# Altium PCB sensor_module.PcbDoc
Units mm, origin at the board's own origin, x right, y up, seen from the top; angles counter-clockwise.
Board outline 17 x 49 mm, 2 copper layers (Top Layer, Bottom Layer), stack 0.573 mm thick; 52 components, 25 nets, 140 pads, 57 vias.
Unrouted connection lines stored in the file: 2.
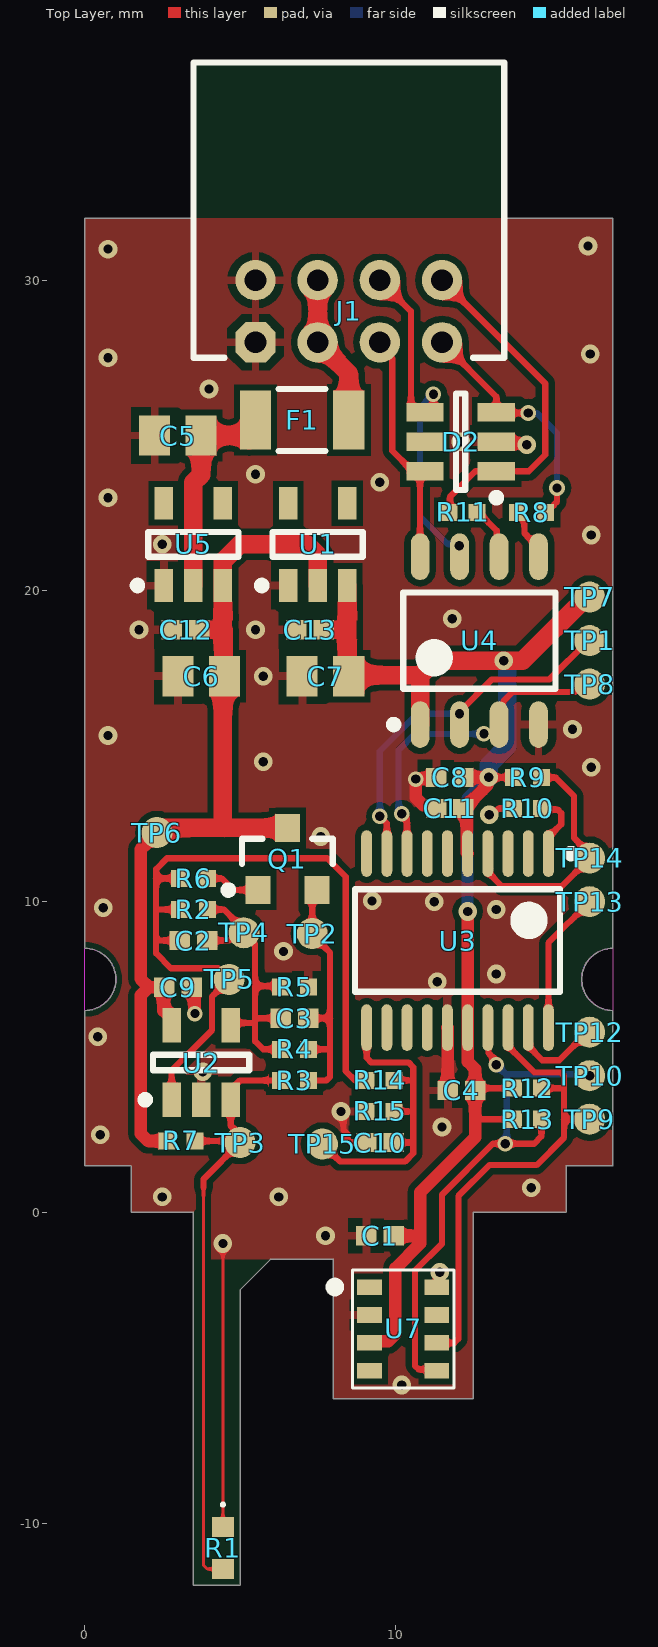
[diagram p0: Top Layer view]
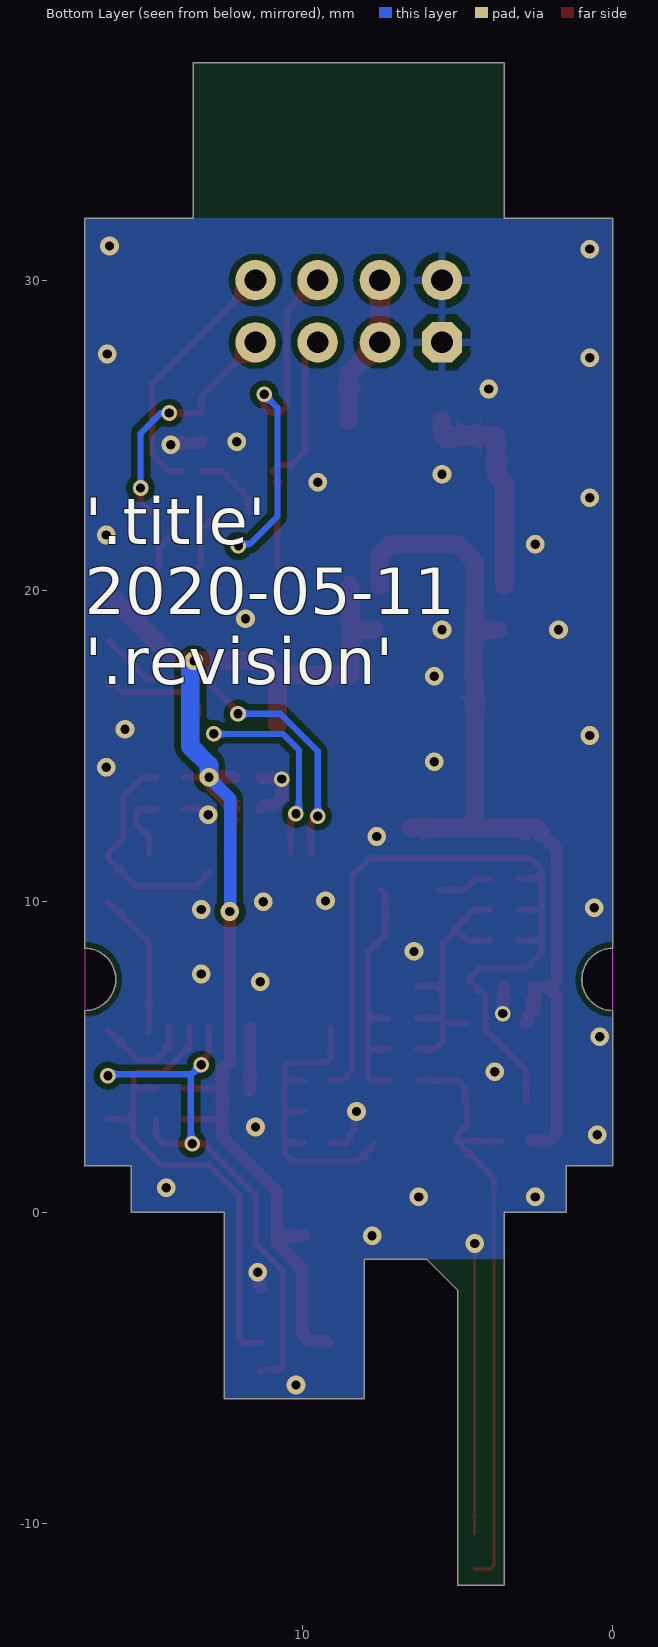
[diagram p1: Bottom Layer view, seen from below]

## Layer stack, top to bottom
Top Solder: solder mask 0.0127, Solder Resist, Dk 3.8
Top Layer: signal copper 0.0356
Dielectric 1: dielectric 0.502, FR-4, Dk 4.8
Bottom Layer: signal copper 0.0356
Bottom Solder: solder mask 0.0127, Solder Resist, Dk 3.8

## Board outline
3.5,-12 3.5,0 1.5,0 1.5,1.5 0,1.5 0,6.498 ccw(c0,7.5) 0,8.502 0,32 3.5,32 3.5,37 13.5,37 13.5,32 17,32 17,8.502 ccw(c17,7.5) 17,6.498 17,1.5 15.5,1.5 15.5,0 12.5,0 12.5,-6 8,-6 8,-1.5 6,-1.5 5,-2.5 5,-12
cut-out: 0,8.502 cw(c0,7.5) 0,6.498
cut-out: 17,6.498 cw(c17,7.5) 17,8.502

## Design rules (kind name [scope] priority, off if disabled: settings)
Clearance [All] p1: gap=0.2 ignorepadtopadclearanceinfootprint=FALSE
PolygonConnect [All] p1: thpad.connectstyle=Relief thpad.reliefconductorwidth=0.254 thpad.reliefentries=4 thpad.polygonreliefangle="90 Angle" thpad.airgapwidth=0.254 smdpad.connectstyle=Relief smdpad.reliefconductorwidth=0.254 smdpad.reliefentries=4 smdpad.polygonreliefangle="90 Angle" smdpad.airgapwidth=0.254 via.connectstyle=Direct via.reliefconductorwidth=0.254 via.reliefentries=4 via.polygonreliefangle="90 Angle" via.airgapwidth=0.254
RoomDefinition sensor_module [InComponentClass('sensor_module')] p1: confinementstyle=ConfineIn formatcopy=TRUE lockcomponents=FALSE outline -1.5,-12 18.5,-12 18.5,38.5 -1.5,38.5
RoutingVias [All] p1: holewidth=0.3 width=0.6 viastyle="Through Hole" minholewidth=0.3 minwidth=0.5 maxholewidth=0.711 maxwidth=1.27
SolderMaskExpansion SolderMaskExpansion_1 [IsVia] p1: expansion=-999 istentingtop=FALSE
SolderMaskExpansion [All] p2: expansion=0.102 istentingtop=FALSE
Width [All] p1: maxlimit=0.6 minlimit=0.2 preferedwidth=0.4
30 further rules are at their usual default settings.

## Components (designator, comment, footprint, x,y, rotation, side; value= is the part's Value field where it differs from the comment)
C1 "4.7uF" CAPC1005X06N 9.5,-0.75 r0 top
C2 "0.10uF" CAPC1005X06N 3.5,8.75 r0 top
C3 "1uF" CAPC1005X06N 6.75,6.25 r180 top
C4 "0.10uF" CAPC1005X06N 12.125,3.925 r0 top
C5 "10uF" CAPC2012X10L 3,25 r180 top
C6 "10uF" CAPC2012X10L 3.75,17.25 r180 top
C7 "10uF" CAPC2012X10L 7.75,17.25 r180 top
C8 "1uF" CAPC1005X06N 11.75,14 r0 top
C9 "0.10uF" CAPC1005X06N 3,7.25 r180 top
C10 "0.10uF" CAPC1005X06N 9.5,2.25 r180 top
C11 "10000pF" CAPC1005X06N 11.75,13 r180 top
C12 "0.10uF" CAPC1005X06N 3.25,18.75 r0 top
C13 "0.10uF" CAPC1005X06N 7.25,18.75 r0 top
D2 "DALC208SC6" STM-SOT23-6L_V 12.1,24.8 r180 top
F1 "nSMD020-30V" SEAANDLAND_1206 7,25.5 r180 top
J1 "S8B-PHDSS" S8B-PHDSS 8.5,29 r180 top
Q1 "MMBT3904LT1G" ONSC-SOT-23-3-318-08_V 6.525,11.375 r90 top
R1 "1K NTC" MURA-NCP18XH103F03RB-2_V 4.45,-10.8 r270 top
R2 "10M" ERJ2G(0402)_N 3.5,9.75 r0 top
R3 "2.2" ERJ2G(0402)_N 6.75,4.25 r0 top
R4 "2k" ERJ2G(0402)_N 6.75,5.25 r0 top
R5 "100k" ERJ2G(0402)_N 6.75,7.25 r180 top
R6 "2k" ERJ2G(0402)_N 3.5,10.75 r180 top
R7 "100k" ERJ2G(0402)_N 3.1,2.3 r0 top
R8 "51" ERJ2G(0402)_N 14.375,22.525 r0 top
R9 "10k" ERJ2G(0402)_N 14.25,14 r0 top
R10 "10k" ERJ2G(0402)_N 14.25,13 r180 top
R11 "51" ERJ2G(0402)_N 12.175,22.525 r180 top
R12 "10K" ERJ2G(0402)_N 14.25,4 r180 top value=10k
R13 "10K" ERJ2G(0402)_N 14.25,3 r180 top value=10k
R14 "3.6k" ERJ2G(0402)_N 9.5,4.25 r180 top
R15 "2k" ERJ2G(0402)_N 9.5,3.25 r180 top
TP1 "TEST_POINT" TP-SMD-1mm#1 16.2,18.4 r0 top
TP2 "TEST_POINT" TP-SMD-1mm#2 7.5,9 r270 top
TP3 "TEST_POINT" TP-SMD-1mm#3 5,2.25 r270 top
TP4 "TEST_POINT" TP-SMD-1mm#4 5.25,9 r270 top
TP5 "TEST_POINT" TP-SMD-1mm#3 4.65,7.5 r270 top
TP6 "TEST_POINT" TP-SMD-1mm#5 2.325,12.25 r270 top
TP7 "TEST_POINT" TP-SMD-1mm#6 16.2,20.1 r270 top
TP8 "TEST_POINT" TP-SMD-1mm#7 16.2,16.6 r0 top
TP9 "TEST_POINT" TP-SMD-1mm#8 16,3 r270 top
TP10 "TEST_POINT" TP-SMD-1mm#9 16.3,4.5 r270 top
TP12 "TEST_POINT" TP-SMD-1mm#10 16.3,6 r270 top
TP13 "TEST_POINT" TP-SMD-1mm#11 16.225,9.4 r270 top
TP14 "TEST_POINT" TP-SMD-1mm#12 16.275,11.9 r270 top
TP15 "TEST_POINT" TP-SMD-1mm#3 7.65,2.2 r90 top
U1 "HT7533-2" SOT95P280X145-5N 7.5,21.5 r90 top
U2 "TLV2371IDBVRG4" TI-DBV5_N 3.75,4.825 r90 top
U3 "STM32F030F4P6" STM-TSSOP20_L 12,8.75 r270 top
U4 "SP3490EN-L" SOIC127P600X175-8N-2 12.7,18.4 r90 top
U5 "HT7590-2" SOT95P280X145-5N 3.5,21.5 r90 top
U7 "HP203B" HP203B 10.25,-3.75 r0 top

## Footprints (in the part's own frame and the unit in brackets; to place one, negate y for a bottom-side part, rotate by r counter-clockwise, add the part's x,y. Pads: shape width x height; smd on the part's side, far side on the other; paste and mask are expansions set on the pad)
CAPC1005X06N [mm] "Chip Capacitor, 2-Leads, Body 1.00x0.50mm, IPC Medium Density"
  rect 0.66x0.62 smd: 1(-0.44,0) 2(0.44,0)
  body extent -0.53,-0.28 0.53,0.27, height 0.55
CAPC2012X10L [mm] "Chip Capacitor, 2-Leads, Body 2.00x1.25mm, IPC High Density"
  rect 1x1.3 smd: 1(-0.75,0) 2(0.75,0)
  body extent -1.05,-0.67 1.05,0.68, height 0.95
ERJ2G(0402)_N [mm] "Chip Resistor, 2-Leads, Body 1.00x0.50mm, IPC Medium Density"
  rect 0.55x0.55 smd: 1(-0.45,0) 2(0.45,0)
  body extent -0.53,-0.27 0.53,0.28, height 0.4
HP203B [mm] "PRECISION BAROMETER AND ALTIMETER SENSOR"
  rect 0.8x0.5 smd: 1(-1.08,1.35) 2(-1.08,0.45) 3(-1.08,-0.45) 4(-1.08,-1.35) 5(1.08,-1.35) 6(1.08,-0.45) 7(1.08,0.45) 8(1.08,1.35)
  silkscreen extent -2.35,-1.9 1.63,1.9, body extent -1.63,-1.9 1.63,1.9, height 1.2
MURA-NCP18XH103F03RB-2_V [mm] "Chip, 2-Leads, Body 1.6x0.8mm"
  rect 0.65x0.7 smd: 1(-0.675,0) 2(0.675,0)
  silkscreen extent -1.45,-0.05 -1.35,0.05, body extent -0.8,-0.4 0.8,0.4, height 0.8
ONSC-SOT-23-3-318-08_V [mm] "SOT23, 3-Leads, Body 2.92x1.3mm, Pitch 0.95mm"
  rect 0.9x0.8 smd: 1(-1,0.95) 2(-1,-0.95) 3(1,0)
  silkscreen extent -1.12,-1.46 0.65,2.02, body extent -0.65,-1.46 0.65,1.46, height 1.11
S8B-PHDSS [mm] "CONN HEADER R/A 8POS 2MM"
  oct 1.3x1.3 hole 0.7: 1(3,1)
  round 1.3 hole 0.7: 2(3,-1) 3(1,1) 4(1,-1) 5(-1,1) 6(-1,-1) 7(-3,1) 8(-3,-1)
  silkscreen extent -5,-8 5,1.5, body extent -4.95,-8 4.95,1.5, height 5
SEAANDLAND_1206 [mm] "Surface Mount Fuses 1206"
  rrect0% 1x1.9 smd paste+0: 1(-1.5,0) 2(1.5,0)
  silkscreen extent -0.75,-1 0.75,1, body extent -1.63,-0.82 1.62,0.82, height 2
SOIC127P600X175-8N-2 [mm] "SOIC, 8-Leads, Body 4.90x3.90mm, Pitch 1.27mm, IPC Medium Density"
  oval 1.5x0.6 smd: 1(-2.7,1.905) 2(-2.7,0.635) 3(-2.7,-0.635) 4(-2.7,-1.905) 5(2.7,-1.905) 6(2.7,-0.635) 7(2.7,0.635) 8(2.7,1.905)
  silkscreen extent -2.82,-2.45 1.55,2.88, body extent -3,-2.45 3,2.45, height 1.75
SOT95P280X145-5N [mm] "SOT23, 5-Leads, Body 2.90x2.80mm, Pitch 0.95mm, IPC Medium Density"
  rect 1.05x0.6 smd: 1(-1.325,0.95) 2(-1.325,0) 3(-1.325,-0.95) 4(1.325,-0.95) 5(1.325,0.95)
  silkscreen extent -1.45,-1.45 0.4,1.92, body extent -1.5,-1.45 1.5,1.45, height 1.45
STM-SOT23-6L_V [mm] "SOT23, 6-Leads, Body 3.05x1.75mm, Pitch 0.95mm"
  rect 1.2x0.6 smd: 1(-1.15,0.95) 2(-1.15,0) 3(-1.15,-0.95) 4(1.15,-0.95) 5(1.15,0) 6(1.15,0.95)
  silkscreen extent -1.28,-1.55 0.15,1.92, body extent -1.6,-1.53 1.6,1.53, height 1.45
STM-TSSOP20_L [mm] "SOP, 20-Leads, Body 6.6x4.5mm, Pitch 0.65mm, IPC High Density"
  oval 1.5x0.35 smd: 1(-2.8,2.925) 2(-2.8,2.275) 3(-2.8,1.625) 4(-2.8,0.975) 5(-2.8,0.325) 6(-2.8,-0.325) 7(-2.8,-0.975) 8(-2.8,-1.625) 9(-2.8,-2.275) 10(-2.8,-2.925) 11(2.8,-2.925) 12(2.8,-2.275) 13(2.8,-1.625) 14(2.8,-0.975) 15(2.8,-0.325) 16(2.8,0.325) 17(2.8,0.975) 18(2.8,1.625) 19(2.8,2.275) 20(2.8,2.925)
  silkscreen extent -2.92,-3.3 1.65,3.78, body extent -2.25,-3.3 2.25,3.3, height 1.2
TI-DBV5_N [mm] "SOT23, 5-Leads, Body 2.9x1.6mm, Pitch 0.95mm, IPC Medium Density"
  rect 1.1x0.6 smd: 1(-1.2,0.95) 2(-1.2,0) 3(-1.2,-0.95) 4(1.2,-0.95) 5(1.2,0.95)
  silkscreen extent -1.32,-1.55 0.25,1.92, body extent -0.87,-1.52 0.87,1.53, height 1.45
TP-SMD-1mm#1 [mm] "Test point, round, 1mm, SMD"
  round 1 smd paste-999: 1(0.05,0)
TP-SMD-1mm#2 [mm] "Test point, round, 1mm, SMD"
  round 1 smd paste-999: 1(0.025,-0.175)
TP-SMD-1mm#3 [mm] "Test point, round, 1mm, SMD"
  round 1 smd paste-999: 1(0,0)
TP-SMD-1mm#4 [mm] "Test point, round, 1mm, SMD"
  round 1 smd paste-999: 1(0,-0.125)
TP-SMD-1mm#5 [mm] "Test point, round, 1mm, SMD"
  round 1 smd paste-999: 1(0.025,0)
TP-SMD-1mm#6 [mm] "Test point, round, 1mm, SMD"
  round 1 smd paste-999: 1(0.3,0.05)
TP-SMD-1mm#7 [mm] "Test point, round, 1mm, SMD"
  round 1 smd paste-999: 1(0.05,0.4)
TP-SMD-1mm#8 [mm] "Test point, round, 1mm, SMD"
  round 1 smd paste-999: 1(0,0.25)
TP-SMD-1mm#9 [mm] "Test point, round, 1mm, SMD"
  round 1 smd paste-999: 1(0.1,-0.05)
TP-SMD-1mm#10 [mm] "Test point, round, 1mm, SMD"
  round 1 smd paste-999: 1(0.2,-0.05)
TP-SMD-1mm#11 [mm] "Test point, round, 1mm, SMD"
  round 1 smd paste-999: 1(-0.6,0.025)
TP-SMD-1mm#12 [mm] "Test point, round, 1mm, SMD"
  round 1 smd paste-999: 1(0.5,-0.025)

## Part data
C1: library part GRM155R60J475ME47D, "CAP CER 4.7UF 6.3V X5R 0402", Case/Package=0402, Digi-Key Part Number=490-5915-1-ND, Manufacturer="Murata Electronics North America", Operating Temperature="-55°C ~ 85°C", Package / Case="0402 (1005 Metric)", Temperature Coefficient=X5R, Tolerance=±20%, Voltage=6.3V, Applications="General Purpose", Datasheets=http://www.murata.com/~/media/webrenewal/support/library/catalog/products/capacitor/mlcc/c02e.pdf, Features="Derating Recommended", Image=//media.digikey.com/Renders/Murata%20Renders/ZRB-SERIES-0402.jpg, Packaging="Cut Tape (CT)", PartNumber=GRM155R60J475ME47D, Series=GRM
C2 C4 C9 C10 C12 C13: library part GRM152R61A104ME19D, "CAP CER 0.1UF 10V X5R 0402", Case/Package=0402, Digi-Key Part Number=490-10009-1-ND, Manufacturer="Murata Electronics North America", Operating Temperature="-55°C ~ 85°C", Package / Case="0402 (1005 Metric)", Temperature Coefficient=X5R, Tolerance=±20%, Voltage=10V, Applications="General Purpose", Datasheets=http://www.murata.com/~/media/webrenewal/support/library/catalog/products/capacitor/mlcc/c02e.pdf, Features="Derating Recommended", Image=//media.digikey.com/Renders/Murata%20Renders/ZRB-SERIES-0402.jpg, Packaging="Cut Tape (CT)", PartNumber=GRM152R61A104ME19D, Series=GRM
C3 C8: library part GRM155R61A105ME15D, "CAP CER 1UF 10V X5R 0402", Case/Package=0402, Digi-Key Part Number=490-5409-1-ND, Manufacturer="Murata Electronics North America", Operating Temperature="-55°C ~ 85°C", Package / Case="0402 (1005 Metric)", Temperature Coefficient=X5R, Tolerance=±20%, Voltage=10V, Applications="General Purpose", Datasheets=http://www.murata.com/~/media/webrenewal/support/library/catalog/products/capacitor/mlcc/c02e.pdf, Features=-, Image=//media.digikey.com/Renders/Murata%20Renders/ZRB-SERIES-0402.jpg, Packaging="Cut Tape (CT)", PartNumber=GRM155R61A105ME15D, Series=GRM
C5 C6 C7: library part GRM21BR61C106ME15L, "CAP CER 10UF 16V X5R 0805", Case/Package=0805, Digi-Key Part Number=490-6474-1-ND, Manufacturer="Murata Electronics North America", Operating Temperature="-55°C ~ 85°C", Package / Case="0805 (2012 Metric)", Temperature Coefficient=X5R, Tolerance=±20%, Voltage=16V, Applications="General Purpose", Datasheets=http://www.murata.com/~/media/webrenewal/support/library/catalog/products/capacitor/mlcc/c02e.pdf, Features=-, Image=//media.digikey.com/Renders/Murata%20Renders/0805%20(2012%20Metric)%20.85mm.jpg, Mounting Type="Surface Mount, MLCC", Part Status=Active, PartNumber=GRM21BR61C106ME15L, Series=GRM
C11: library part GRM155R61C103KA01D, "CAP CER 10000PF 16V X5R 0402", Case/Package=0402, Digi-Key Part Number=490-6309-1-ND, Manufacturer="Murata Electronics North America", Operating Temperature="-55°C ~ 85°C", Package / Case="0402 (1005 Metric)", Temperature Coefficient=X5R, Tolerance=±10%, Voltage=16V, Applications="General Purpose", Datasheets=http://www.murata.com/~/media/webrenewal/support/library/catalog/products/capacitor/mlcc/c02e.pdf, Features=-, Image=//media.digikey.com/Renders/Murata%20Renders/ZRB-SERIES-0402.jpg, Packaging="Cut Tape (CT)", PartNumber=GRM155R61C103KA01D, Series=GRM
D2: library part CMP-2000-06138-1, "Low Capacitance Diode Array, 1 uA, 1.2 V, -55 to 150 degC, 6-Pin SOT23-6L, RoHS, Tape and Reel", Avg. Forward Curr (Max)=0.2, Capacitance Value=10pF, Manufacturer=STMicroelectronics, Operating Temp Range=-55Cto150C, Operating Temperature Classification=Military, Operating Temperature Max Deg. C=150C, Operating Temperature Min Deg. C=-55C, Package / Case=SOT-23, Package Description="6-Pin Small Outline Transistor, Body 2.925 x 1.625 mm, Pitch 0.95 mm", Package Reference=SOT23-6L, Peak Non-Repetitive Surge Current=6A, Peak Non-Repetitive Surge Current (Max)=6, Peak Rep Rev Volt=9, Rev Curr=1, Working Voltage=9V, Configuration=Octal, Datasheet URL=http://www.st.com/st-web-ui/static/active/en/resource/technical/document/datasheet/CD00001734.pdf, Datasheet Version="Rev. 7, 03/2008", Direction Type=Uni-Directional, Manufacturer URL=http://www.st.com/, Mounting=SurfaceMount, Mounting Style=SurfaceMount, Mounting Technology=SurfaceMount, Package Type=SOT-23, Packaging=TapeandReel, Pin Count=6, Product Depth (mm)=1.75mm, Product Height (mm)=1.3mm, Product Length (mm)=3.05mm, Rad Hardened=No, Suppressor Type=DiodeArrays, Working Voltage (Max)=9V
F1: "Surface Mount Fuses 30V 100A 200mA 460mA 1206 RoHS", Manufacturer="Sea & Land Electronic Corp", PartNumber=NSMD020-30V, ComponentLink2Description=Datasheet, ComponentLink2URL="nSMD020-30V 0-2A-30V-Self-healing-fuse_C69680.pdf"
J1: "CONN HEADER R/A 8POS 2MM", Manufacturer=JST, PartNumber=S8B-PHDSS
Q1: library part CMP-1048-00631-1, "General Purpose Transistor, NPN Silicon, 3-Pin SOT-23, Pb-Free, Tape and Reel", Manufacturer="On Semiconductor", ComponentLink1Description="Manufacturer URL", ComponentLink1URL=http://www.onsemi.com/, ComponentLink2Description=Datasheet, ComponentLink2URL=http://www.onsemi.cn/pub_link/Collateral/MMBT3904LT1-D.PDF, ComponentLink3Description="Package Specification", ComponentLink3URL=http://www.onsemi.cn/pub_link/Collateral/318-08.PDF, DatasheetVersion="Rev. 12", fT Min (MHz)=300, IC Continuous (A)=0.2, Mounting Technology="Surface Mount", PackageDescription="3-Pin Small Outline Transistor, Body 2.92 x 1.3 mm, Pitch 0.95 mm", PackageReference=SOT-23-3-318-08, PackageVersion="Rev. AP, 11/2009", Packing="Tape and Reel", PartNumber=MMBT3904LT1G, Polarity=NPN, RoHS=TRUE
R1: library part CMP-2000-05271-1, "NTC Thermistor, 10 KOhm, +/- 1%, 0.1 W, -40 to 125 degC, 0603 (1608 Metric), RoHS, Tape and Reel", Manufacturer=Murata, Rated Current=310A, Resistance=10kO, Temperature Range=-40to+125degC, Tolerance (%)=±1%, B-constant=3434K, Datasheet URL=http://www.jameco.com/Jameco/Products/ProdDS/1870999.pdf, Datasheet Version=Apr-05, Manufacturer URL=http://www.murata.com/, Type=NTC
R2: library part ERJ-2GEJ106X, "RES SMD 10M OHM 5% 1/10W 0402", Case/Package=0402, Digi-Key Part Number=P10MJCT-ND, Manufacturer="Panasonic Electronic Components", Operating Temperature="-55°C ~ 155°C", Package / Case="0402 (1005 Metric)", Power (Watts)="0.1W, 1/10W", Temperature Coefficient="-400/ +150ppm/°C", Tolerance=±5%, @ qty=1500, Composition="Thick Film", Datasheets=http://industrial.panasonic.com/www-cgi/jvcr13pz.cgi?E+PZ+3+AOA0001+ERJ2GEJ106X+7+WW, Factory Stock=0, Failure Rate=-, Features="Automotive AEC-Q200", Height - Seated (Max)="0.016\" (0.40mm)", Image=//media.digikey.com/Photos/Panasonic%20Photos/ERJ-PA2-Series.jpg, Minimum Quantity=1, Number of Terminations=2, Packaging="Cut Tape (CT)", Part Number=ERJ-2GEJ106X, Part Status=Active, PartNumber=ERJ-2GEJ106X, Quantity Available=54777, Series=ERJ, Size / Dimension="0.039\" L x 0.020\" W (1.00mm x 0.50mm)", Unit Price (USD)=0.00350
R3: library part ERJ-2GEJ2R2X, "RES SMD 2.2 OHM 5% 1/10W 0402", Case/Package=0402, Digi-Key Part Number=P2.2JCT-ND, Manufacturer="Panasonic Electronic Components", Operating Temperature="-55°C ~ 155°C", Package / Case="0402 (1005 Metric)", Power (Watts)="0.1W, 1/10W", Temperature Coefficient="-100/ +600ppm/°C", Tolerance=±5%, Composition="Thick Film", Datasheets=http://industrial.panasonic.com/www-cgi/jvcr13pz.cgi?E+PZ+3+AOA0001+ERJ2GEJ2R2X+7+WW, Features="Automotive AEC-Q200", Height - Seated (Max)="0.016\" (0.40mm)", Image=//media.digikey.com/Photos/Panasonic%20Photos/ERJ-PA2-Series.jpg, Number of Terminations=2, PartNumber=ERJ-2GEJ2R2X, Series=ERJ, Size / Dimension="0.039\" L x 0.020\" W (1.00mm x 0.50mm)"
R4 R6 R15: library part ERJ-2RKF2001X, "RES SMD 2K OHM 1% 1/10W 0402", Case/Package=0402, Digi-Key Part Number=P2.00KLCT-ND, Manufacturer="Panasonic Electronic Components", Operating Temperature="-55°C ~ 155°C", Package / Case="0402 (1005 Metric)", Power (Watts)="0.1W, 1/10W", Temperature Coefficient=±100ppm/°C, Tolerance=±1%, @ qty=1500, Composition="Thick Film", Datasheets=http://industrial.panasonic.com/www-cgi/jvcr13pz.cgi?E+PZ+3+AOA0002+ERJ2RKF2001X+7+WW, Factory Stock=0, Failure Rate=-, Features="Automotive AEC-Q200", Height - Seated (Max)="0.016\" (0.40mm)", Image=//media.digikey.com/Photos/Panasonic%20Photos/ERJ-PA2-Series.jpg, Minimum Quantity=1, Number of Terminations=2, Packaging="Cut Tape (CT)", Part Number=ERJ-2RKF2001X, Part Status=Active, PartNumber=ERJ-2RKF2001X, Quantity Available=413346, Series=ERJ, Size / Dimension="0.039\" L x 0.020\" W (1.00mm x 0.50mm)", Unit Price (USD)=0.00496
R5 R7: library part ERJ-2RKF1003X, "RES SMD 100K OHM 1% 1/10W 0402", Case/Package=0402, Digi-Key Part Number=P100KLCT-ND, Manufacturer="Panasonic Electronic Components", Operating Temperature="-55°C ~ 155°C", Package / Case="0402 (1005 Metric)", Power (Watts)="0.1W, 1/10W", Temperature Coefficient=±100ppm/°C, Tolerance=±1%, @ qty=1500, Composition="Thick Film", Datasheets=http://industrial.panasonic.com/www-cgi/jvcr13pz.cgi?E+PZ+3+AOA0002+ERJ2RKF1003X+7+WW, Factory Stock=0, Failure Rate=-, Features="Automotive AEC-Q200", Height - Seated (Max)="0.016\" (0.40mm)", Image=//media.digikey.com/Photos/Panasonic%20Photos/ERJ-PA2-Series.jpg, Minimum Quantity=1, Number of Terminations=2, Packaging="Cut Tape (CT)", Part Number=ERJ-2RKF1003X, Part Status=Active, PartNumber=ERJ-2RKF1003X, Quantity Available=2645965, Series=ERJ, Size / Dimension="0.039\" L x 0.020\" W (1.00mm x 0.50mm)", Unit Price (USD)=0.00496
R8 R11: library part ERJ-2GEJ510X, "RES SMD 51 OHM 5% 1/10W 0402", Case/Package=0402, Digi-Key Part Number=P51JCT-ND, Manufacturer="Panasonic Electronic Components", Operating Temperature="-55°C ~ 155°C", Package / Case="0402 (1005 Metric)", Power (Watts)="0.1W, 1/10W", Temperature Coefficient=±200ppm/°C, Tolerance=±5%, @ qty=1500, Composition="Thick Film", Datasheets=http://industrial.panasonic.com/www-cgi/jvcr13pz.cgi?E+PZ+3+AOA0001+ERJ2GEJ510X+7+WW, Factory Stock=0, Failure Rate=-, Features="Automotive AEC-Q200", Height - Seated (Max)="0.016\" (0.40mm)", Image=//media.digikey.com/Photos/Panasonic%20Photos/ERJ-PA2-Series.jpg, Minimum Quantity=1, Number of Terminations=2, Packaging="Cut Tape (CT)", Part Number=ERJ-2GEJ510X, Part Status=Active, PartNumber=ERJ-2GEJ510X, Quantity Available=159188, Series=ERJ, Size / Dimension="0.039\" L x 0.020\" W (1.00mm x 0.50mm)", Unit Price (USD)=0.00350
R9 R10 R12 R13: library part ERJ-2GEJ103X, "RES SMD 10K OHM 5% 1/10W 0402", Case/Package=0402, Digi-Key Part Number=P10KJCT-ND, Manufacturer="Panasonic Electronic Components", Operating Temperature="-55°C ~ 155°C", Package / Case="0402 (1005 Metric)", Power (Watts)="0.1W, 1/10W", Temperature Coefficient=±200ppm/°C, Tolerance=±5%, @ qty=1500, Composition="Thick Film", Datasheets=http://industrial.panasonic.com/www-cgi/jvcr13pz.cgi?E+PZ+3+AOA0001+ERJ2GEJ103X+7+WW, Factory Stock=0, Failure Rate=-, Features="Automotive AEC-Q200", Height - Seated (Max)="0.016\" (0.40mm)", Image=//media.digikey.com/Photos/Panasonic%20Photos/ERJ-PA2-Series.jpg, Minimum Quantity=1, Number of Terminations=2, Packaging="Cut Tape (CT)", Part Number=ERJ-2GEJ103X, Part Status=Active, PartNumber=ERJ-2GEJ103X, Quantity Available=2560215, Series=ERJ, Size / Dimension="0.039\" L x 0.020\" W (1.00mm x 0.50mm)", Unit Price (USD)=0.00350
R14: library part ERJ-2RKF3601X, "RES SMD 3.6K OHM 1% 1/10W 0402", Case/Package=0402, Digi-Key Part Number=P3.60KLCT-ND, Manufacturer="Panasonic Electronic Components", Operating Temperature="-55°C ~ 155°C", Package / Case="0402 (1005 Metric)", Power (Watts)="0.1W, 1/10W", Temperature Coefficient=±100ppm/°C, Tolerance=±1%, @ qty=1500, Composition="Thick Film", Datasheets=http://industrial.panasonic.com/www-cgi/jvcr13pz.cgi?E+PZ+3+AOA0002+ERJ2RKF3601X+7+WW, Factory Stock=0, Failure Rate=-, Features="Automotive AEC-Q200", Height - Seated (Max)="0.016\" (0.40mm)", Image=//media.digikey.com/Photos/Panasonic%20Photos/ERJ-PA2-Series.jpg, Minimum Quantity=1, Number of Terminations=2, Packaging="Cut Tape (CT)", Part Number=ERJ-2RKF3601X, Part Status=Active, PartNumber=ERJ-2RKF3601X, Quantity Available=24331, Series=ERJ, Size / Dimension="0.039\" L x 0.020\" W (1.00mm x 0.50mm)", Unit Price (USD)=0.00496
TP1 TP2 TP3 TP4 TP5 TP6 TP7 TP8 TP9 TP10 TP12 TP13 TP14 TP15: "Test point"
U1: "3.3V 100mA TinyPower LDO", Manufacturer=Holtek, PartNumber=HT7533-2
U2: library part CMP-0272-03306-2, "550 uA/Ch, 3 MHz, RRIO Operational Amplifier, 2.7 to 16 V, -40 to 125 degC, 5-pin SOT23 (DBV5), Green (RoHS & no Sb/Br)", Manufacturer="Texas Instruments", Rating=Catalog, Total Supply Voltage(Max)(+5V is 5, +/-5V is 10)=16, Total Supply Voltage(Min)(+5V is 5, +/-5V is 10)=2.7, CMRR(Min)(dB)=50, Code_JEDEC=MO-178, ComponentLink1Description="Manufacturer URL", ComponentLink1URL=http://www.ti.com/, ComponentLink2Description=Datasheet, ComponentLink2URL=http://www.ti.com/lit/ds/symlink/tlv2371.pdf, ComponentLink3Description="Package Specification", ComponentLink3URL=http://www.ti.com/litv/pdf/mpds018i, DatasheetVersion=SLOS270D, Eco-Plan="Green (RoHS & no Sb/Br)", GBW(Typ)(MHz)=3, IIB(Max)(pA)=60, Iq per channel(Max)(mA)=0.9, Mounting Technology="Surface Mount", Number of Channels=1, Offset Drift(Typ)(uV/C)=2, PackageDescription="5-Pin Plastic Small Outline, Body 1.6 x 2.9 mm, Pitch 0.95 mm", PackageReference=DBV5, PackageVersion="4073253-4/K, 03/2006", Packing="LARGE T&R", PartNumber=TLV2371IDBVRG4, Slew Rate(Typ)(V/us)=2.4, Sub Family="Low Supply Voltage Amplifier (<=2.7V), Precision Amplifier", Vio (25C)(Max)(mV)=4.5
U3: library part CMP-0304-00039-2, "ARM Cortex-M0 32-bit MCU, 16 KB Flash, 4 KB Internal RAM, 15 I/Os, 20-pin TSSOP, -40 to 85 degC, Tube", I/Os (High Current)=15, Operating Frequency(F) (Processor speed) (MHz)=48, Supply Voltage(Vcc) min (V)=2.4, ComponentLink1Description="Manufacturer URL", ComponentLink1URL=http://www.st.com/web/en/home.html, ComponentLink2Description=Datasheet, ComponentLink2URL=http://www.st.com/st-web-ui/static/active/en/resource/technical/document/datasheet/DM00088500.pdf, ComponentLink3Description="Package Specification", ComponentLink3URL=http://www.st.com/st-web-ui/static/active/en/resource/technical/document/datasheet/DM00065136.pdf, Core="ARM Cortex-M0", DatasheetVersion="Rev. 1", FLASH Size (Prog) (kB)=16, Internal RAM Size (kB)=4, Mounting Technology="Surface Mount", PackageDescription="20-Pin Thin Shrink Small Outline Package, 6.5 x 4.4 mm Body, 0.65 mm Pitch", PackageReference=TSSOP20, PackageVersion="Rev. 1, 11/2012", Packing=Tube, PartNumber=STM32F030F4P6
U4: "+3.3V Low Power Full-Duplex RS-485 Transceivers with 10Mbps Data Rate", Manufacturer=Exar, PartNumber=SP3490EN-L
U5: "9V 100mA TinyPower LDO", Manufacturer=Holtek, PartNumber=HT7590-2
U7: "PRECISION BAROMETER AND ALTIMETER SENSOR", Manufacturer=HopeRF, PartNumber=HP203B

## Via types
v1: diameter 0.6, hole 0.3, Top Layer to Bottom Layer, 44 vias
v2: diameter 0.5, hole 0.3, Top Layer to Bottom Layer, 13 vias

## Nets (pads, with @x,y where several pads share a name; then routed paths per layer and width w, separated by ;. In a path a pad name is that pad's centre, name@x,y a point inside that pad or via, vN(x,y) a via of type N, cw(c..) or ccw(c..) an arc to the next point about the centre after c; other vN are vias at no path point)
+3.3V: C1.2 C4.2 C7.1 C8.2 C11.1 C13.2 R9.1 R12.2 R13.2 TP7.1 U1.3 U3.5 U3.16 U4.1 U7.3 | length 46.4
  Top Layer w0.2: 12.565,3.17 12.735,3 R13.2 ; C4.2 12.64,4 R12.2 ; v1(13,14) R9.1
  Top Layer w0.4: U7.3 9.22,-4.15 9.766,-4.15 10,-3.916 10,-1.797 10.797,-1 10.797,-0.798 ; C1.2 10.749,-0.75 10.797,-0.798 ; C8.2 v1(13,14) 12.962,13.962 12.962,13.752 12.21,13 C11.1 12.3,12.89 12.3,11.575 U3.5 ; v1(12.325,9.685) U3.16 12.331,5.944 12.331,4.85 12.565,4.616 C4.2 12.565,3.17 12.565,2.415 10.797,0.647 10.797,0.25 10.797,-0.798
  Top Layer w0.6: C13.2 8.45,18.75 ; U1.3 8.45,18.75 ; U4.1 10.795,17.29 ; TP7.1 16.142,19.8 14.092,17.75 11.257,17.75 10.797,17.29 10.795,17.29 ; 8.45,18.75 8.45,17.3 C7.1 8.54,17.29 10.795,17.29
  Bottom Layer w0.4: v1(12.325,9.685) 12.32,9.69 12.32,13.32 v1(13,14)
  Bottom Layer w0.6: v1(13,14) 13,14.399 13.6,14.999 13.6,17.633 v1(13.483,17.75)
+9V: C6.1 C9.2 C12.2 Q1.3 R7.1 TP6.1 U1.2 U2.5 U5.3 | length 30.7
  Top Layer w0.4: 2.067,7.25 1.8,7.517 1.8,11.691 2.325,12.216 TP6.1 ; C9.2@2.533,7.077 2.533,6.492 2.725,6.3 2.725,6.175 U2.5@2.8,6.1 ; C9.2 2.067,7.25 1.8,6.983 1.8,2.534 2.034,2.3 R7.1@2.625,2.3
  Top Layer w0.6: TP6.1 2.475,12.375 4.5,12.375 ; C12.2 4.44,18.75 ; Q1.3 4.5,12.375 ; U1.2 7.5,21.149 7.149,21.5 5,21.5 4.45,20.95 U5.3 4.45,18.76 4.44,18.75 ; 4.44,18.75 4.46,18.75 4.47,18.74 4.47,17.28 C6.1 4.45,17.2 4.45,12.425 4.5,12.375
+12V: C5.1 F1.2 U5.2 | length 7.3
  Top Layer w0.6: U5.2 3.5,23.488 3.75,23.738 C5.1 5.3,25 5.5,25.2 F1.2 ; F1.2@5.3,24.85 F1.2@5.5,25.05
+12V_IN: F1.1 J1.3 J1.4 | length 4.9
  Top Layer w0.6: J1.4 J1.3 7.5,27.999 8.5,26.999 F1.1
\R\S\T: R9.2 TP14.1 U3.4 | length 7.3
  Top Layer w0.2: U3.4@12.975,10.953 13.428,10.5 15.35,10.5 TP14.1 16.25,11.55 15.75,12.05 15.75,13.4 15.158,13.992 14.708,13.992 R9.2
BOOT0: R10.1 U3.1 | length 2.2
  Top Layer w0.2: R10.1 14.733,12.967 15.218,12.967 15.335,12.85 15.335,12.488 15,12.154 14.994,12.154 14.925,12.084 U3.1
GND: C1.1 C4.1 C5.2 C6.2 C7.2 C8.1 C9.1 C10.2 C11.2 C12.1 C13.1 D2.2 J1.1 J1.2 R1.1 R5.1 R10.2 R15.2 U1.1 U2.2 U3.15 U4.4 U5.1 U7.2 U7.8 | length 18.4
  Top Layer w0.102: R1.1@4.45,-10.35 R1.1 v1(4.45,-1)
  Top Layer w0.2: v1(8.25,3.25) 8.327,3.173 8.327,2.655 8.45,2.531 8.45,2.367 8.567,2.25 C10.2 ; v1(13.02,12.8) 13.122,12.8 13.322,13 R10.2
  Top Layer w0.4: C9.1@3.49,7.25 3.531,7.209 3.531,6.419 v2(3.55,6.4) ; C11.2 11.2,13.11 10.894,13.11 10.654,13.35 v2(10.654,13.946) 10.673,13.965 11.275,13.965 C8.1 ; U7.8 11.342,-2.4 11.392,-2.35 11.392,-1.961 v1(11.43,-1.923) ; U3.15 11.68,5.945 11.68,3.93 C4.1 ; D2.2 13.305,24.745 14.187,24.745 v1(14.225,24.707)
  other v1: 10.2,-5.55 7.75,-0.75 2.5,0.5 6.25,0.5 14.375,0.8 0.5,2.5 11.5,2.75 3.8,4.525 0.425,5.65 11.35,7.425 13.25,7.675 6.4,8.4 13.25,9.75 0.6,9.8 11.25,10 9.25,10.025 7.6,12.1 16.3,14.325 5.75,14.5 0.75,15.35 15.7,15.55 5.75,17.25 1.75,18.75 5.5,18.75 11.825,19.105 2.5,21.5 16.3,21.8 0.75,23 9.5,23.5 5.5,23.75 12.1,24.8 4,26.5 0.75,27.5 16.275,27.625 0.75,31 16.2,31.1
I2C1_SCL: R13.1 TP10.1 U3.17 U7.5 | length 17.9
  Top Layer w0.2: U7.5 11.28,-5.05 10.75,-5.05 10.63,-4.93 10.63,-1.874 11.5,-1.004 11.5,0.575 13.139,2.214 v2(13.539,2.214) 14.464,2.214 14.7,2.45 R13.1 ; U3.17 12.999,5.926 12.999,5.127 13.193,4.933 13.193,4.807 v2(13.25,4.75)
  Bottom Layer w0.2: v2(13.25,4.75) 13.583,4.417 13.583,2.258 v2(13.539,2.214) ; 13.583,4.45 16.2,4.45 v2(16.25,4.4)
I2C1_SDA: R12.1 TP9.1 U3.18 U7.6 | length 15.9
  Top Layer w0.2: U7.6 11.9,-4.2 12.03,-4.07 12.03,0.53 13.025,1.525 14.542,1.525 15.425,2.408 15.425,3 ; U3.18 13.625,5.353 14.478,4.5 15.324,4.5 15.425,4.399 15.425,4.007 ; R12.1 15.418,4 15.425,4.007 ; TP9.1 15.425,3 ; 15.425,3 15.425,4.007
NetQ1_1: Q1.1 R6.1 | length 1.8
  Top Layer w0.2: R6.1 4.408,10.75 4.783,10.375 Q1.1
NetR8_1: R8.1 U4.5 | length 2.1
  Top Layer w0.2: R8.1@13.9,22.525 R8.1 14.15,22.3 14.15,21.855 14.605,21.4 U4.5@14.605,20.75
NetR11_1: R11.1 U4.6 | length 2.1
  Top Layer w0.2: R11.1@12.65,22.525 12.675,22.525 13.258,21.942 13.258,20.827 U4.6@13.335,20.75
SENSE+: R1.2 R3.1 R7.2 TP3.1 U2.3 | length 19.7
  Top Layer w0.102: 3.825,0.8 3.825,-11.35 3.95,-11.475 R1.2
  Top Layer w0.2: R7.2@3.575,2.3 3.577,2.302 4.96,2.302 TP3.1@5.006,2.256 ; 3.825,0.8 3.825,1.075 TP3.1@5.006,2.256 ; R3.1@6.275,4.25 5,4.25 4.75,4 4.75,3.6 4.7,3.55 4.7,2.8 5.006,2.494 TP3.1@5.006,2.256
SENSE-: C2.2 C3.2 R2.2 R4.1 R5.2 TP4.1 U2.4 | length 9.8
  Top Layer w0.2: C2.2 4.659,8.75 4.909,9 TP4.1 ; R2.2 4.48,9.75 5.125,9.105 TP4.1 ; U2.4@4.7,6.1 5.408,6.1 5.483,6.175 ; 5.483,5.5 5.483,6.1 5.483,6.175 ; 5.483,6.25 5.483,7.284 ; 5.5,5.5 5.75,5.25 R4.1 ; R5.2 6.266,7.284 5.483,7.284 ; C3.2 5.558,6.25 5.483,6.175 ; TP4.1 5.483,8.642 5.483,7.284
SENSOR_RX+: D2.6 J1.5 U4.8 | length 8.2
  Top Layer w0.2: J1.5 9.717,27.783 9.849,27.783 9.849,27.533 9.9,27.482 9.9,24.511 10.361,24.05 10.75,24.05 D2.6 10.795,23.695 U4.8@10.795,20.75
SENSOR_RX-: D2.4 J1.6 U4.7 | length 11.5
  Top Layer w0.2: J1.6 10.5,29 10.5,25.95 10.7,25.75 D2.4 11.025,25.75 11.225,25.95 v2(11.225,26.325)
  Bottom Layer w0.2: v2(11.225,26.325) 10.795,25.895 10.795,22.394 11.682,21.507 11.993,21.507 v2(12.05,21.45)
SENSOR_TX+: D2.3 J1.7 R8.2 | length 7.9
  Top Layer w0.2: J1.7 13.25,26.25 D2.3 13.275,25.725 v2(14.275,25.725) ; R8.2@14.85,22.525 14.875,22.525 15.1,22.75 15.1,22.775 15.2,22.875 v2(15.2,23.313)
  Bottom Layer w0.2: v2(14.275,25.725) 14.55,25.725 15.2,25.075 v2(15.2,23.313)
SENSOR_TX-: D2.1 J1.8 R11.2 | length 10.5
  Top Layer w0.2: J1.8 14.825,26.675 14.825,24.384 14.291,23.85 13.9,23.85 ; R11.2@11.7,22.525 11.758,22.583 11.758,23.033 12.575,23.85 D2.1
SWCLK: TP13.1 U3.20 | length 4.7
  Top Layer w0.2: U3.20@14.925,5.869 U3.20@14.994,5.8 ; U3.20 14.925,8.675 TP13.1
SWDIO: TP12.1 U3.19 | length 3.2
  Top Layer w0.2: U3.19 14.275,5.353 14.728,4.9 15.275,4.9 TP12.1@16.25,5.875
USART1_RX: TP1.1 U3.9 U4.2 | length 11.6
  Top Layer w0.2: v2(9.5,12.75) 9.725,12.525 U3.9 ; v2(12.065,16.05) 12.065,16.115 13.1,17.15 14.95,17.15 TP1.1@16.2,18.4
  Bottom Layer w0.2: v2(9.5,12.75) 9.5,14.843 10.707,16.05 v2(12.065,16.05)
USART1_TX: TP8.1 U3.8 U4.3 | length 9.9
  Top Layer w0.2: v2(10.2,12.828) 10.375,12.653 U3.8 ; U4.3@13.335,16.05 13.335,16.258 13.478,16.402 13.478,16.455 13.773,16.75 15.784,16.75 16.034,17 TP8.1
  Bottom Layer w0.2: v2(10.2,12.828) 10.1,12.928 10.1,14.878 10.622,15.4 v2(12.85,15.4)
VBRIDGE: C3.1 Q1.2 R3.2 R4.2 TP2.1 | length 8.4
  Top Layer w0.2: R3.2 7.783,4.25 7.9,4.367 7.9,5.247 ; R4.2 7.897,5.25 7.9,5.247 ; C3.1@7.24,6.25 7.9,6.25 ; Q1.2 7.325,10.225 7.325,8.933 7.9,8.358 7.9,6.25 ; 7.9,5.247 7.9,6.25
VFB: C2.1 R2.1 R6.2 R14.2 TP5.1 U2.1 | length 26
  Top Layer w0.2: U2.1@2.8,3.55 2.8,4.571 4.1,5.871 4.1,6.95 TP5.1 4.29,7.86 2.775,7.86 2.3,8.335 2.3,8.867 ; R2.1 2.325,9.75 2.3,9.775 ; R6.2 2.3,10.75 ; C2.1 2.417,8.75 2.3,8.867 ; R14.2@9.1,4.25 8.7,4.25 8.4,4.55 8.4,10.8 7.8,11.4 2.65,11.4 2.3,11.05 2.3,10.75 ; 2.3,8.867 2.3,9.775 ; 2.3,9.775 2.3,10.75
VFB_CLAMPED: C10.1 R14.1 R15.1 TP15.1 U3.11 | length 10.6
  Top Layer w0.2: TP15.1 7.661,2.2 8.221,1.64 10.313,1.64 10.575,1.902 10.575,2.254 ; U3.11 9.075,4.975 9.225,4.825 10.425,4.825 10.575,4.675 10.575,4.223 ; R15.1 10.574,3.25 ; R14.1 10.548,4.25 10.575,4.223 ; C10.1@10,2.19 C10.1 10.571,2.25 10.575,2.254 ; 10.575,2.254 10.575,3.249 10.575,4.223
pads on no net: D2.5 U1.4 U1.5 U3.2 U3.3 U3.6 U3.7 U3.10 U3.12 U3.13 U3.14 U5.4 U5.5 U7.1 U7.4 U7.7

## Polygon pours and split planes (outlines as drawn)
GND on Top Layer "GND_L01_P000" (solid, remove dead copper, pour order 0): 8,-6 12.5,-6 12.5,0 15.5,0 15.5,1.5 17,1.5 17,32 0,32 0,1.5 1.5,1.5 1.5,0 3.5,0 3.5,-1.5 8,-1.5
GND on Top Layer "GND_L01_P001" (solid, pour order 1): 17.75,-4.5
GND on Bottom Layer "GND_L02_P002" (solid, pour order 2): 8,-6 12.5,-6 12.5,0 15.5,0 15.5,1.5 17,1.5 17,32 0,32 0,1.5 1.5,1.5 1.5,0 3.5,0 3.5,-1.5 8,-1.5

## Silkscreen, mask and mechanical layers (free items; w line width, h text height)
Bottom Overlay:
  text "'.title' / 2020-05-11 / '.revision'" at 17,17 h1.5
Mechanical 1:
  the board outline again, w0.1
Dimensions:
  lines w0.05: -2.5,-22 21.5,-22 ; -2.5,-21 21.5,-21 ; -2.5,-1 21.5,-1 ; -2.5,0 21.5,0
  lines w0.1: 1.5,0 1.5,32 ; 11.5,-9.32 11.5,-8.05 ; 12.77,-8.05 11.5,-8.05 ; 15.5,0 15.5,32 ; 21.66,-18.21 11.5,-8.05
  lines w0.2: -20.944,-40.475 -14.045,-40.475 1.517,-40.475 15.913,-40.475 26.811,-40.475 36.375,-40.475 44.273,-40.475 ; -20.944,-38.475 -14.045,-38.475 1.517,-38.475 15.913,-38.475 26.811,-38.475 36.375,-38.475 44.273,-38.475 ; -20.944,-36.475 -14.045,-36.475 1.517,-36.475 15.913,-36.475 26.811,-36.475 36.375,-36.475 44.273,-36.475 ; -20.944,-34.475 -14.045,-34.475 1.517,-34.475 15.913,-34.475 26.811,-34.475 36.375,-34.475 44.273,-34.475 ; -20.944,-32.475 -14.045,-32.475 1.517,-32.475 15.913,-32.475 26.811,-32.475 36.375,-32.475 44.273,-32.475 ; -20.944,-30.475 -14.045,-30.475 1.517,-30.475 15.913,-30.475 26.811,-30.475 36.375,-30.475 44.273,-30.475 ; -20.944,-28.475 44.273,-28.475 ; -14.045,-26.475 -14.045,-42.475 ; 1.517,-26.475 1.517,-42.475 ; 15.913,-26.475 15.913,-42.475 ; 26.811,-26.475 26.811,-42.475 ; 36.375,-26.475 36.375,-42.475 ; -14.045,-42.475 -20.944,-42.475 -20.944,-26.475 44.273,-26.475 44.273,-42.475 36.375,-42.475 ; -14.045,-42.475 1.517,-42.475 ; 1.517,-42.475 15.913,-42.475 ; 15.913,-42.475 26.811,-42.475 ; 26.811,-42.475 36.375,-42.475
  text "Pressure sensor and thermistor inside tube" at 23,-20 h1.25
  text "Tube cutaway" at -13.9,-20.75 h2 r90
  text "Layer" at -19.744,-27.975 h1
  text "Name" at -12.845,-27.975 h1
  text "Material" at 2.717,-27.975 h1
  text "Thickness" at 17.113,-27.975 h1
  text "Constant" at 28.011,-27.975 h1
  text "Gerber" at 37.575,-27.975 h1
  text "Top Overlay" at -12.845,-29.975 h1
  text "GTO" at 37.575,-29.975 h1
  text "Top Solder" at -12.845,-31.975 h1
  text "Solder Resist" at 2.717,-31.975 h1
  text "0.013mm" at 17.113,-31.975 h1
  text "3.8" at 28.011,-31.975 h1
  text "GTS" at 37.575,-31.975 h1
  text "1" at -19.744,-33.975 h1
  text "Top Layer" at -12.845,-33.975 h1
  text "Copper" at 2.717,-33.975 h1
  text "0.036mm" at 17.113,-33.975 h1
  text "GTL" at 37.575,-33.975 h1
  text "Dielectric 1" at -12.845,-35.975 h1
  text "FR-4" at 2.717,-35.975 h1
  text "0.502mm" at 17.113,-35.975 h1
  text "4.8" at 28.011,-35.975 h1
  text "2" at -19.744,-37.975 h1
  text "Bottom Layer" at -12.845,-37.975 h1
  text "Copper" at 2.717,-37.975 h1
  text "0.036mm" at 17.113,-37.975 h1
  text "GBL" at 37.575,-37.975 h1
  text "Bottom Solder" at -12.845,-39.975 h1
  text "Solder Resist" at 2.717,-39.975 h1
  text "0.013mm" at 17.113,-39.975 h1
  text "3.8" at 28.011,-39.975 h1
  text "GBS" at 37.575,-39.975 h1
  text "Bottom Overlay" at -12.845,-41.975 h1
  text "GBO" at 37.575,-41.975 h1
  text "Total board thickness:" at -19.744,-43.975 h1
  text "0.599mm" at 17.113,-43.975 h1

## Dimensions
13.5,37 to 3.5,37 on Dimensions
17,32 to 0,32 on Dimensions
17,32 to 13.5,37 on Dimensions
17,32 to 21.5,0 on Dimensions
3.5,-12 to 5,-12 on Dimensions
17,32 to 5,-12 on Dimensions
-2.5,0 to -2.5,-11 on Dimensions
-2.5,0 to -2.5,-22 on Dimensions